# Altium PCB PCB1.PcbDoc (part 11 of 12)
Units mm, origin at the board's own origin, x right, y up, seen from the top; angles counter-clockwise.
Board outline 100 x 100 mm, 6 copper layers (Top Layer, Int1 (GND), Int2 (Sign), Int3 (Sign), Int4 (PWR), Bottom Layer), stack 1.538 mm thick; 614 components, 712 nets, 3014 pads, 1096 vias.
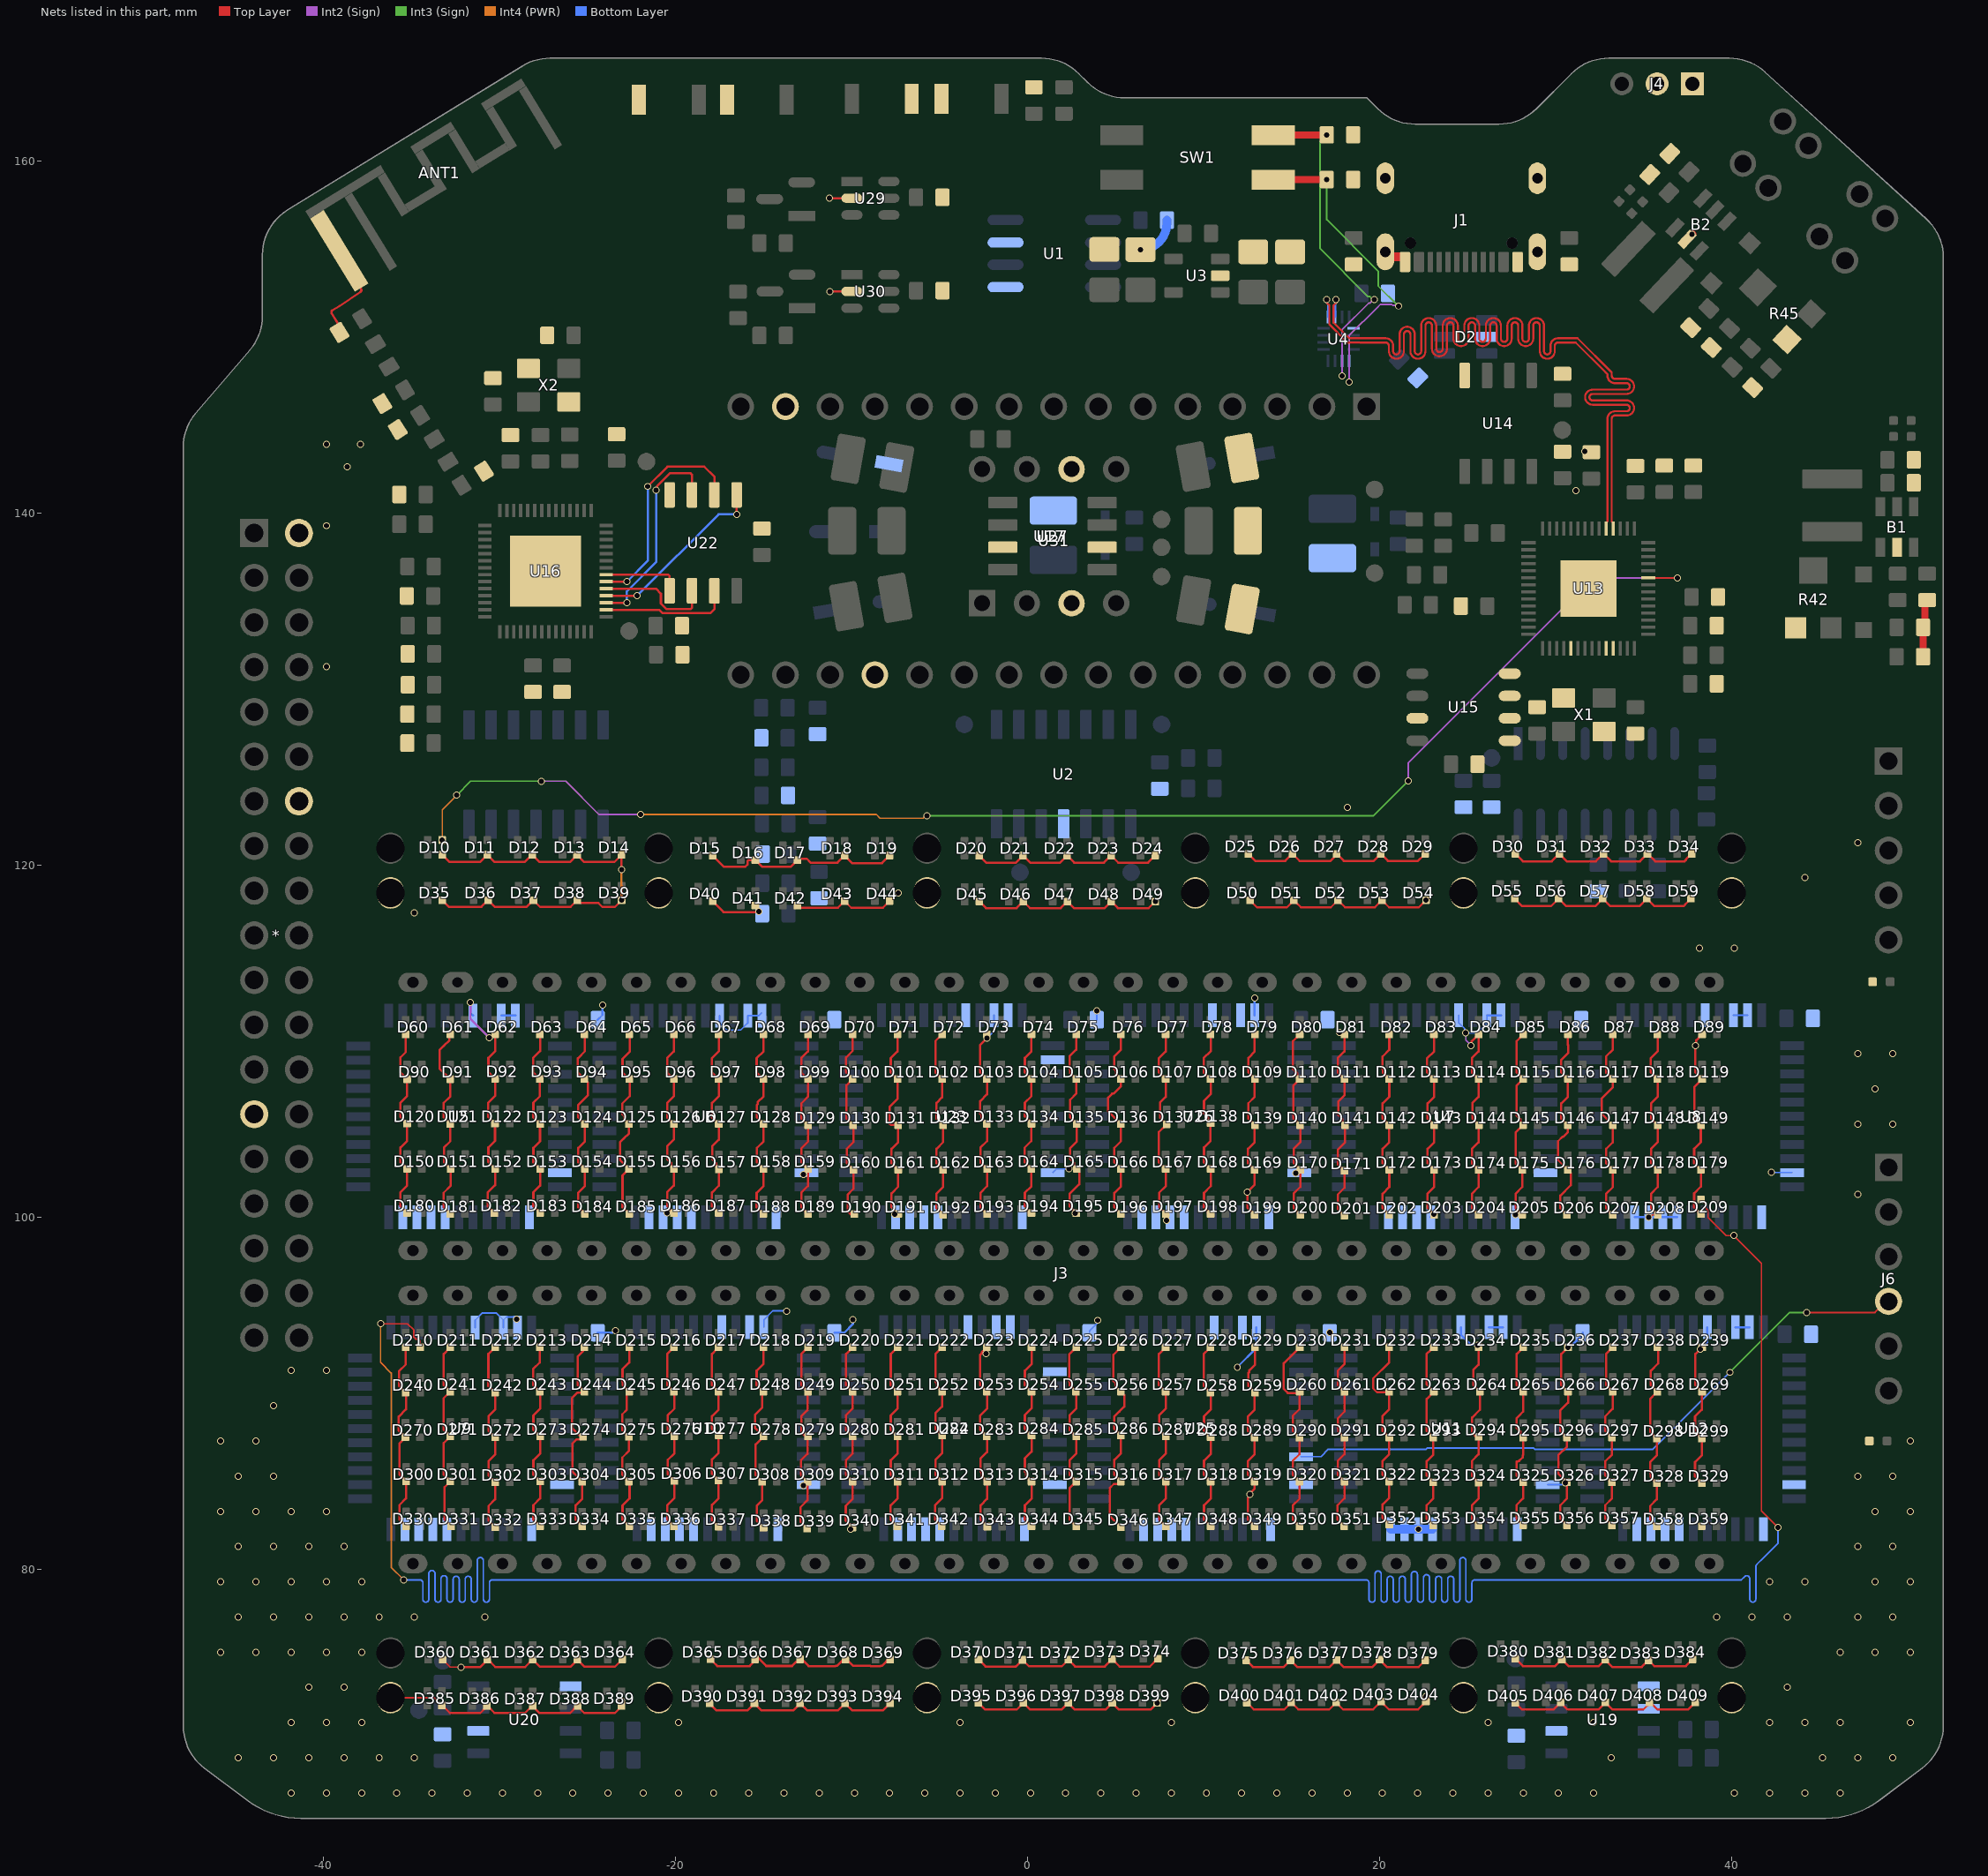
[diagram p14: the nets of this part, all layers, seen from the top]

## Via types
v1: diameter 0.4, hole 0.3, Top Layer to Bottom Layer, tented both sides, 1087 vias
v2: diameter 0.4, hole 0.3, Top Layer to Bottom Layer, 6 vias
v3: diameter 0.4, hole 0.3, Top Layer to Bottom Layer, tented top, 2 vias
v4: diameter 0.6, hole 0.5, Top Layer to Bottom Layer, 1 vias

## Nets (pads, with @x,y where several pads share a name; then routed paths per layer and width w, separated by ;. In a path a pad name is that pad's centre, name@x,y a point inside that pad or via, vN(x,y) a via of type N, cw(c..) or ccw(c..) an arc to the next point about the centre after c; other vN are vias at no path point) (continued)
REF: *.2 *.14 *.27 ANT1.2 B1.2 B2.2 C1.1 C2.1 C3.1 C4.1 C5.1 C6.1 C7.1 C8.1 C9.1 C10.1 C11.1 C12.1 C13.1 C14.1 C15.1 C16.1 C17.1 C18.1 C20.1 C21.1 C23.1 C25.1 C26.1 C27.1 C28.1 C29.1 C30.1 C31.1 C32.1 C33.1 C44.1 C45.1 C46.1 C47.1 C48.1 C49.1 C50.1 C51.1 C52.1 C53.1 C54.1 C55.1 C56.1 C57.1 C58.1 C59.1 C60.1 C61.1 C62.1 C63.1 C64.1 C65.1 C66.1 C67.1 C68.1 C69.1 C70.1 C71.1 C72.1 C73.1 C74.1 C75.1 C76.1 C77.1 C78.1 C79.1 C80.1 C81.1 C82.1 C83.1 C84.1 C85.1 C86.1 D1.K D2.2 D8.1 D10.3 D11.3 D12.3 D13.3 D14.3 D15.3 D16.3 D17.3 D18.3 D19.3 D20.3 D21.3 D22.3 D23.3 D24.3 D25.3 D26.3 D27.3 D28.3 D29.3 D30.3 D31.3 D32.3 D33.3 D34.3 D35.3 D36.3 D37.3 D38.3 D39.3 D40.3 D41.3 D42.3 D43.3 D44.3 D45.3 D46.3 D47.3 D48.3 D49.3 D50.3 D51.3 D52.3 D53.3 D54.3 D55.3 D56.3 D57.3 D58.3 D59.3 D60.3 D61.3 D62.3 D63.3 D64.3 D65.3 D66.3 D67.3 D68.3 D69.3 D70.3 D71.3 D72.3 D73.3 D74.3 D75.3 D76.3 D77.3 D78.3 D79.3 D80.3 D81.3 D82.3 D83.3 D84.3 D85.3 D86.3 D87.3 D88.3 D89.3 D90.3 D91.3 D92.3 D93.3 D94.3 D95.3 D96.3 D97.3 D98.3 D99.3 D100.3 D101.3 D102.3 D103.3 D104.3 D105.3 D106.3 D107.3 D108.3 D109.3 D110.3 D111.3 D112.3 D113.3 D114.3 D115.3 D116.3 D117.3 D118.3 D119.3 D120.3 D121.3 D122.3 D123.3 D124.3 D125.3 D126.3 D127.3 D128.3 D129.3 D130.3 D131.3 D132.3 D133.3 D134.3 D135.3 D136.3 D137.3 D138.3 D139.3 D140.3 D141.3 D142.3 D143.3 D144.3 D145.3 D146.3 D147.3 D148.3 D149.3 D150.3 D151.3 D152.3 D153.3 D154.3 D155.3 D156.3 D157.3 D158.3 D159.3 D160.3 D161.3 D162.3 D163.3 D164.3 D165.3 D166.3 D167.3 D168.3 D169.3 D170.3 D171.3 D172.3 D173.3 D174.3 D175.3 D176.3 D177.3 D178.3 D179.3 D180.3 D181.3 D182.3 D183.3 D184.3 D185.3 D186.3 D187.3 D188.3 D189.3 D190.3 D191.3 D192.3 D193.3 D194.3 D195.3 D196.3 D197.3 D198.3 D199.3 D200.3 D201.3 D202.3 D203.3 D204.3 D205.3 D206.3 D207.3 D208.3 D209.3 D210.3 D211.3 D212.3 D213.3 D214.3 D215.3 D216.3 D217.3 D218.3 D219.3 D220.3 D221.3 D222.3 D223.3 D224.3 D225.3 D226.3 D227.3 D228.3 D229.3 D230.3 D231.3 D232.3 D233.3 D234.3 D235.3 D236.3 D237.3 D238.3 D239.3 D240.3 D241.3 D242.3 D243.3 D244.3 D245.3 D246.3 D247.3 D248.3 D249.3 D250.3 D251.3 D252.3 D253.3 D254.3 D255.3 D256.3 D257.3 D258.3 D259.3 D260.3 D261.3 D262.3 D263.3 D264.3 D265.3 D266.3 D267.3 D268.3 D269.3 D270.3 D271.3 D272.3 D273.3 D274.3 D275.3 D276.3 D277.3 D278.3 D279.3 D280.3 D281.3 D282.3 D283.3 D284.3 D285.3 D286.3 D287.3 D288.3 D289.3 D290.3 D291.3 D292.3 D293.3 D294.3 D295.3 D296.3 D297.3 D298.3 D299.3 D300.3 D301.3 D302.3 D303.3 D304.3 D305.3 D306.3 D307.3 D308.3 D309.3 D310.3 D311.3 D312.3 D313.3 D314.3 D315.3 D316.3 D317.3 D318.3 D319.3 D320.3 D321.3 D322.3 D323.3 D324.3 D325.3 D326.3 D327.3 D328.3 D329.3 D330.3 D331.3 D332.3 D333.3 D334.3 D335.3 D336.3 D337.3 D338.3 D339.3 D340.3 D341.3 D342.3 D343.3 D344.3 D345.3 D346.3 D347.3 D348.3 D349.3 D350.3 D351.3 D352.3 D353.3 D354.3 D355.3 D356.3 D357.3 D358.3 D359.3 D360.3 D361.3 D362.3 D363.3 D364.3 D365.3 D366.3 D367.3 D368.3 D369.3 D370.3 D371.3 D372.3 D373.3 D374.3 D375.3 D376.3 D377.3 D378.3 D379.3 D380.3 D381.3 D382.3 D383.3 D384.3 D385.3 D386.3 D387.3 D388.3 D389.3 D390.3 D391.3 D392.3 D393.3 D394.3 D395.3 D396.3 D397.3 D398.3 D399.3 D400.3 D401.3 D402.3 D403.3 D404.3 D405.3 D406.3 D407.3 D408.3 D409.3 J1.A1B12 J1.B1A12 J1.SH J3.62 J3.64 J4.1 J4.2 JP6.2 JP7.2 R2.2 R3.2 R5.1 R6.1 R7.1 R15.1 R23.1 R25.1 R28.1 R34.1 R42.1 R43.1 R45.1 R46.1 SW2.1 SW3.2 SW4.1 SW5.1 U1.5 U1.7 U2.11 U3.2 U4.1 U5.10 U5.12 U5.18 U5.19 U5.20 U5.21 U5.40 U5.42 U5.43 U6.10 U6.12 U6.18 U6.19 U6.20 U6.21 U6.40 U6.42 U6.43 U7.10 U7.12 U7.18 U7.19 U7.20 U7.21 U7.40 U7.42 U7.43 U8.10 U8.12 U8.18 U8.19 U8.20 U8.21 U8.40 U8.42 U8.43 U9.10 U9.12 U9.18 U9.19 U9.20 U9.21 U9.40 U9.42 U9.43 U10.10 U10.12 U10.18 U10.19 U10.20 U10.21 U10.40 U10.42 U10.43 U11.10 U11.12 U11.18 U11.19 U11.20 U11.21 U11.40 U11.42 U11.43 U12.10 U12.12 U12.18 U12.19 U12.20 U12.21 U12.40 U12.42 U12.43 U13.19 U13.57 U14.4 U15.1 U15.2 U15.3 U15.4 U15.7 U16.57 U17.3 U17.6 U19.1 U19.2 U19.6 U20.1 U20.6 U22.4 U23.2 U23.10 U23.12 U23.18 U23.19 U23.20 U23.21 U23.40 U23.42 U23.43 U24.2 U24.10 U24.12 U24.18 U24.19 U24.20 U24.21 U24.40 U24.42 U24.43 U25.10 U25.12 U25.18 U25.19 U25.20 U25.21 U25.40 U25.42 U25.43 U26.10 U26.12 U26.18 U26.19 U26.20 U26.21 U26.40 U26.42 U26.43 U27.3 U27.6 U29.2 U30.2 U31.14 U31.19 X1.2 X1.4 X2.2 X2.4 | length 978.4
  Top Layer w0.09: ANT1.2@-40.273,156.663 -39.12,155.51 ANT1.2@-39.12,154.905 ; J3.64@-36.202,72.716 -36.2,72.713 -33.733,72.713 D385.3@-33.281,72.262 ; D360.3@-33.24,74.882 -32.81,74.452 v1(-32.21,74.452) ; D389.3@-23.08,72.251 v1(-23.08,72.539) ; v1(-20.489,100.253) -20.259,100.253 D186.3@-20.107,100.253 ; D41.3@-15.479,117.719 -15.316,117.556 -15.316,117.416 -15.324,117.408 v1@-15.357,117.375 ; D44.3@-7.857,117.971 -7.392,118.436 v1(-7.356,118.436) ; D394.3@-7.83,72.393 v1(-7.83,72.681) ; v1(-7.569,100.193) -7.512,100.193 D191.3@-7.36,100.193 ; v1(-2.365,92.25) -2.365,92.583 D223.3@-2.327,92.621 ; v1(-2.327,110.182) D73.3@-2.327,110.401 ; v1@3.928,111.735 v1(3.929,111.733) ; C1.1@14.891,154.683 14.891,154.844 C1.1@14.905,154.858 C1.1@15.106,155.059 ; v1(17.7,110.522) 17.872,110.522 D81.3@17.993,110.401 ; v1(22.618,72.781) 22.62,72.779 D404.3@22.62,72.493 ; D54.3@22.623,118.021 v1(22.63,118.028) ; v1(27.699,100.153) D205.3@28.09,100.153 ; v1(35.287,100.013) 35.353,100.013 35.483,100.143 D208.3@35.79,100.143
  Top Layer w0.127: ANT1.2@-39.12,154.905 -37.934,152.833 -37.884,152.75 cw(c-37.992,152.684) -37.92,152.579 -39.1,151.777 cw(c-39.171,151.882) -39.107,151.772 -39.504,151.541 ccw(c-39.44,151.431) -39.549,151.365 -39.156,150.716 C54.1@-39.104,150.281 ; D270.3@-35.468,87.565 -35.468,87.61 -35.739,87.881 -35.739,88.684 -35.324,89.099 -35.324,90.058 -35.352,90.058 -35.726,90.431 -35.726,91.261 -35.347,91.64 -35.347,92.542 D210.3@-35.411,92.606 ; D300.3@-35.449,85.021 -35.465,85.037 -35.465,85.148 -35.692,85.375 -35.692,87.171 -35.33,87.533 D270.3@-35.324,87.533 ; D120.3@-35.404,105.36 -35.412,105.368 -35.412,105.479 -35.639,105.706 -35.639,106.515 -35.26,106.893 D90.3@-35.26,107.853 -35.639,108.231 -35.639,109.095 -35.347,109.386 D60.3@-35.347,110.401 ; D150.3@-35.385,102.816 -35.412,102.843 -35.412,102.914 -35.639,103.141 -35.639,103.97 -35.26,104.348 D120.3@-35.26,105.328 ; D330.3@-35.324,82.458 -35.703,82.836 -35.703,83.652 -35.324,84.03 D300.3@-35.324,84.968 ; D180.3@-35.26,100.253 -35.639,100.631 -35.639,101.432 -35.26,101.811 D150.3@-35.26,102.763 ; D35.3@-33.27,118.021 -32.895,117.645 -31.045,117.645 D36.3@-30.665,118.025 -30.285,117.645 -28.469,117.645 D37.3@-28.089,118.025 -27.707,117.642 -26.014,117.642 -26.011,117.645 -25.972,117.645 D38.3@-25.596,118.021 -25.445,117.869 -24.397,117.869 -24.17,117.642 -23.455,117.642 v1(-23.076,118.021) ; D10.3@-33.27,120.611 -32.848,120.188 -31.13,120.188 D11.3@-30.707,120.611 -30.285,120.188 -28.58,120.188 D12.3@-28.157,120.611 -27.742,120.196 -26.011,120.196 D13.3@-25.607,120.6 -25.202,120.196 -23.491,120.196 D14.3@-23.087,120.6 -23.088,120.449 v1(-23.088,119.771) ; D360.3@-33.243,74.886 D360.3@-33.24,74.882 ; D385.3@-33.241,72.249 -32.837,71.845 -31.106,71.845 -30.85,72.1 D386.3@-30.814,72.1 ; D271.3@-32.904,87.56 -32.904,87.646 -33.189,87.931 -33.189,89.721 -32.857,90.053 -32.76,90.053 -32.76,90.056 -33.186,90.481 -33.186,92.242 -32.847,92.581 D211.3@-32.847,92.601 ; D301.3@-32.885,85.016 -32.885,85.077 -33.189,85.381 -33.189,87.174 -32.835,87.528 D271.3@-32.76,87.528 ; D181.3@-32.842,100.225 -32.842,100.235 -33.189,100.581 -33.189,101.398 -32.793,101.794 D151.3@-32.793,102.763 -33.171,103.141 -33.171,103.971 -32.81,104.332 D121.3@-32.81,105.313 -33.189,105.691 -33.189,106.507 -32.81,106.886 D91.3@-32.81,107.853 -33.421,108.463 -33.421,109.51 -33.178,109.753 -33.175,109.753 -32.858,110.07 -32.858,110.35 D61.3@-32.807,110.401 ; D331.3@-32.76,82.453 -33.139,82.831 -33.139,84.674 -32.85,84.963 D301.3@-32.76,84.963 ; v1@-32.21,74.463 -31.103,74.463 -30.68,74.886 -30.258,74.463 -28.553,74.463 D362.3@-28.13,74.886 -27.715,74.471 -25.984,74.471 -25.58,74.876 -25.175,74.471 -23.464,74.471 D364.3@-23.06,74.876 ; D386.3@-30.701,72.249 -30.297,71.845 -28.556,71.845 -28.151,72.249 -27.738,71.836 -26.014,71.836 -25.601,72.249 -25.197,71.845 -23.456,71.845 D389.3@-23.065,72.235 ; v1(-30.596,110.218) -30.543,110.271 -30.397,110.271 D62.3@-30.267,110.401 -30.267,109.44 -30.646,109.061 -30.646,108.252 D92.3@-30.267,107.874 -30.267,106.905 -30.649,106.523 -30.649,105.706 D122.3@-30.271,105.328 -30.271,104.346 -30.646,103.971 -30.646,103.141 D152.3@-30.307,102.803 ; D272.3@-30.404,87.51 -30.412,87.518 -30.412,87.654 -30.639,87.881 -30.639,88.702 -30.26,89.081 -30.26,90.046 -30.646,90.431 -30.646,92.242 -30.347,92.541 D212.3@-30.347,92.551 ; D182.3@-30.394,100.227 -30.394,100.334 -30.688,100.629 -30.688,101.409 -30.267,101.83 D152.3@-30.267,102.763 ; D302.3@-30.385,84.966 -30.412,84.993 -30.412,85.104 -30.639,85.331 -30.639,86.152 -30.26,86.531 D272.3@-30.26,87.478 ; D332.3@-30.26,82.403 -30.639,82.781 -30.639,83.602 -30.26,83.981 D302.3@-30.26,84.913 ; D273.3@-27.854,87.56 -27.862,87.568 -27.862,87.704 -28.089,87.931 -28.089,88.752 -27.71,89.131 -27.71,90.086 -28.09,90.466 -28.09,90.653 -28.106,90.669 -28.106,91.38 -27.727,91.758 -27.727,92.531 D213.3@-27.797,92.601 ; D183.3@-27.837,100.217 -27.862,100.242 -27.862,100.404 -28.089,100.631 -28.089,101.427 -27.71,101.806 D153.3@-27.71,102.753 ; D303.3@-27.835,85.016 -27.862,85.043 -27.862,85.154 -28.089,85.381 -28.089,86.202 -27.71,86.581 D273.3@-27.71,87.528 ; D153.3@-27.75,102.793 -28.089,103.131 -28.089,103.954 -27.714,104.329 -27.714,105.318 -27.725,105.318 -28.089,105.681 -28.089,106.521 -27.727,106.882 -27.727,107.847 D93.3@-27.714,107.86 ; D93.3@-27.727,107.874 -28.106,108.252 -28.106,109.053 -27.71,109.448 D63.3@-27.71,110.391 ; D333.3@-27.71,82.453 -28.089,82.831 -28.089,83.652 -27.71,84.031 D303.3@-27.71,84.963 ; D274.3@-25.454,87.59 -25.893,88.03 -25.893,89.748 -25.593,90.048 -25.189,90.048 -25.161,90.077 -25.567,90.482 -25.567,92.105 D214.3@-25.26,92.411 ; D304.3@-25.435,85.046 -25.462,85.073 -25.462,85.144 -25.869,85.552 -25.869,87.164 -25.64,87.393 -25.412,87.393 -25.31,87.495 D274.3@-25.31,87.558 ; D334.3@-25.31,82.483 -25.34,82.483 -25.689,82.831 -25.689,83.647 -25.31,84.026 D304.3@-25.31,84.993 ; D184.3@-25.287,100.217 -25.312,100.243 -25.312,100.354 -25.539,100.581 -25.539,101.402 -25.16,101.781 D154.3@-25.16,102.753 ; D154.3@-25.2,102.793 -25.539,103.131 -25.539,103.954 -25.164,104.329 -25.164,105.318 -25.175,105.318 -25.539,105.681 -25.539,106.397 -24.987,106.948 -24.987,107.661 D94.3@-25.16,107.834 ; D94.3@-25.187,107.861 -25.566,108.239 -25.566,109.042 -25.16,109.447 D64.3@-25.16,110.391 ; D275.3@-22.804,87.59 -22.812,87.598 -22.812,87.694 -23.039,87.921 -23.039,88.816 -22.791,89.064 -22.791,89.952 -22.66,90.083 -22.66,90.116 -23.008,90.463 -23.008,90.651 -23.026,90.669 -23.026,91.38 -22.647,91.758 -22.647,92.531 D215.3@-22.747,92.631 ; D305.3@-22.785,85.046 -22.812,85.073 -22.812,85.144 -23.039,85.371 -23.039,86.36 -22.66,86.739 D275.3@-22.66,87.558 ; D185.3@-22.747,100.178 -22.747,100.302 -23.026,100.581 -23.026,102.387 D155.3@-22.7,102.713 ; D335.3@-22.66,82.483 -22.677,82.483 -23.026,82.831 -23.026,83.636 -22.625,84.037 -22.625,84.957 D305.3@-22.66,84.993 ; D155.3@-22.66,102.753 -23.154,103.246 -23.154,104.287 -22.946,104.495 -22.66,104.78 -22.66,105.253 -22.636,105.278 -22.946,105.588 -22.946,105.776 -23.039,105.869 -23.039,106.468 -22.612,106.895 -22.612,107.495 -22.621,107.503 -22.621,107.834 -23.026,108.239 -23.026,109.004 -22.621,109.409 D65.3@-22.621,110.351 ; D186.3@-20.259,100.253 -20.259,100.404 -20.486,100.631 -20.486,101.427 -20.107,101.806 D156.3@-20.107,102.738 ; D276.3@-20.222,87.627 -20.24,87.645 -20.24,87.716 -20.467,87.943 -20.467,88.753 -20.078,89.142 -20.078,90.12 -20.124,90.12 -20.486,90.481 -20.486,92.242 -20.165,92.563 D216.3@-20.165,92.668 ; D306.3@-20.203,85.083 -20.23,85.11 -20.23,85.181 -20.457,85.408 -20.457,86.222 -20.078,86.6 D276.3@-20.078,87.595 ; D156.3@-20.147,102.778 -20.262,102.893 -20.262,103.092 -20.489,103.319 -20.489,104.046 -20.11,104.424 D126.3@-20.11,105.303 -20.489,105.681 -20.489,106.504 -20.107,106.886 D96.3@-20.107,107.861 -20.486,108.239 -20.486,109.055 -20.107,109.434 D66.3@-20.107,110.376 ; D336.3@-20.078,82.52 -20.177,82.52 -20.489,82.831 -20.489,83.65 -20.078,84.06 D306.3@-20.078,85.03 ; D390.3@-18.08,72.393 -17.676,71.988 -15.935,71.988 D391.3@-15.53,72.393 -15.126,71.988 -13.335,71.988 D392.3@-12.93,72.393 -12.526,71.988 -10.785,71.988 D393.3@-10.38,72.393 -9.976,71.988 -8.235,71.988 D394.3@-7.83,72.393 ; D40.3@-17.907,117.971 -17.287,117.35 -16.582,117.35 -16.573,117.341 -15.391,117.341 v1@-15.357,117.375 ; D15.3@-17.907,120.561 -17.277,119.931 -16.045,119.931 -15.931,120.045 -15.931,120.235 -15.856,120.309 D16.3@-15.479,120.309 -15.101,119.931 -13.458,119.931 -13.014,120.375 -12.555,120.375 -12.337,120.156 -10.812,120.156 D18.3@-10.407,120.561 -9.982,120.135 -8.283,120.135 D19.3@-7.857,120.561 ; D365.3@-17.88,74.983 -17.875,74.977 -17.875,74.744 -17.637,74.506 -15.807,74.506 -15.33,74.983 -14.862,74.514 -13.399,74.514 -13.172,74.741 -13.092,74.741 -12.93,74.903 -12.93,74.983 -12.454,74.506 -10.921,74.506 -10.904,74.524 -10.839,74.524 -10.38,74.983 -9.921,74.524 -8.946,74.524 -8.914,74.492 -8.386,74.492 -8.354,74.524 -8.289,74.524 D369.3@-7.83,74.983 ; D277.3@-17.708,87.651 -17.712,87.655 -17.712,87.754 -17.939,87.981 -17.939,88.711 -17.564,89.086 -17.564,90.144 -17.609,90.144 -17.946,90.481 -17.946,92.242 -17.651,92.537 D217.3@-17.651,92.692 ; D307.3@-17.689,85.107 -17.716,85.134 -17.716,85.205 -17.943,85.432 -17.943,86.253 -17.564,86.631 D277.3@-17.564,87.619 ; D187.3@-17.684,100.202 -17.714,100.233 -17.714,100.403 -17.941,100.63 -17.941,101.417 -17.557,101.801 D157.3@-17.557,102.738 ; D157.3@-17.597,102.778 -17.707,102.888 -17.707,103.079 -17.934,103.306 -17.934,104.042 -17.56,104.415 D127.3@-17.56,105.303 -17.939,105.681 -17.939,106.504 -17.557,106.886 -17.557,107.851 -17.946,108.239 -17.946,109.05 -17.557,109.439 D67.3@-17.557,110.376 ; D337.3@-17.564,82.544 -17.682,82.544 -17.946,82.808 -17.946,83.665 -17.564,84.046 D307.3@-17.564,85.054 ; v1@-15.324,117.408 v1(-15.291,117.375) ; D308.3@-15.209,85.033 -15.237,85.06 -15.237,85.131 -15.464,85.358 -15.464,87.1 -15.16,87.403 D278.3@-15.16,87.509 ; D218.3@-15.172,92.618 -15.172,92.614 -15.027,92.469 -15.027,91.665 -15.406,91.286 -15.406,90.481 -15.085,90.16 -15.085,89.204 -15.504,88.785 -15.504,88.046 D278.3@-15.01,87.553 ; D188.3@-15.138,100.216 -15.138,100.314 -15.406,100.581 -15.406,101.394 -15.012,101.788 D158.3@-15.012,102.751 ; D338.3@-15.085,82.47 -15.112,82.47 -15.384,82.742 -15.384,83.636 -15.085,83.935 D308.3@-15.085,84.98 ; D158.3@-15.052,102.791 -15.052,102.794 -15.389,103.131 -15.389,103.954 -15.015,104.328 -15.015,105.308 -15.389,105.681 -15.389,106.397 -15.345,106.44 -15.345,106.551 -15.012,106.884 -15.012,107.845 -15.406,108.239 -15.406,109.047 -15.012,109.441 D68.3@-15.012,110.389 ; D42.3@-13.079,117.719 -12.952,117.592 -10.786,117.592 D43.3@-10.407,117.971 -10.029,117.592 -8.236,117.592 D44.3@-7.857,117.971 ; v1(-12.741,84.757) D309.3@-12.513,84.985 ; v1(-12.737,102.448) -12.737,102.504 D159.3@-12.526,102.716 ; D279.3@-12.656,87.582 -12.866,87.792 -12.866,88.695 -12.513,89.048 -12.513,90.128 -12.866,90.481 -12.866,92.242 -12.6,92.508 D219.3@-12.6,92.623 ; D309.3@-12.637,85.038 -12.665,85.065 -12.665,85.137 -12.891,85.364 -12.891,86.193 -12.513,86.572 D279.3@-12.513,87.55 ; D189.3@-12.614,100.219 -12.639,100.244 -12.639,100.353 -12.866,100.58 -12.866,101.402 -12.487,101.781 D159.3@-12.487,102.754 ; D159.3@-12.527,102.794 -12.866,103.133 -12.866,103.925 -12.491,104.3 -12.491,105.251 -12.862,105.622 -12.862,106.478 -12.487,106.853 D99.3@-12.487,107.861 -12.866,108.239 -12.866,109.055 -12.487,109.434 D69.3@-12.487,110.392 ; D339.3@-12.513,82.475 -12.516,82.478 -12.685,82.478 -12.912,82.705 -12.912,83.531 -12.513,83.931 -12.513,84.757 ; v1(-11.273,157.908) U29.2@-9.996,157.908 ; v1(-11.25,152.608) U30.2@-9.995,152.608 ; D280.3@-10.104,87.59 -10.112,87.598 -10.112,87.704 -10.339,87.931 -10.339,88.752 -9.96,89.131 -9.96,90.116 -10.326,90.481 -10.326,92.242 -10.047,92.521 D220.3@-10.047,92.631 ; D310.3@-10.085,85.046 -10.112,85.073 -10.112,85.144 -10.339,85.371 -10.339,86.197 -9.96,86.576 D280.3@-9.96,87.558 ; v1(-10.077,82.274) D340.3@-9.964,82.387 ; D340.3@-10.06,82.483 -10.342,82.765 -10.342,83.612 -9.96,83.994 D310.3@-9.96,84.993 ; D190.3@-10.037,100.167 -10.239,100.369 -10.239,101.296 -9.91,101.625 D160.3@-9.91,102.703 ; D160.3@-9.95,102.743 -10.289,103.081 -10.289,103.899 -9.914,104.274 -9.914,105.268 -9.948,105.268 -10.303,105.622 -10.303,107.505 -9.984,107.824 -9.91,107.824 -10.099,108.012 -10.293,108.229 cw(c-10.199,108.314) -10.326,108.314 -10.326,109.092 -9.947,109.471 -9.947,110.304 D70.3@-9.91,110.341 ; D281.3@-7.551,87.59 -7.559,87.598 -7.559,87.704 -7.786,87.931 -7.786,88.752 -7.407,89.131 D251.3@-7.407,90.103 -7.786,90.481 -7.786,92.242 -7.494,92.534 D221.3@-7.494,92.631 ; D311.3@-7.532,85.046 -7.559,85.073 -7.559,85.144 -7.786,85.371 -7.786,86.197 -7.407,86.576 D281.3@-7.407,87.558 ; D191.3@-7.512,100.193 D191.3@-7.487,100.167 ; D191.3@-7.512,100.344 -7.739,100.571 -7.739,101.372 -7.36,101.751 D161.3@-7.36,102.703 ; D341.3@-7.407,82.483 -7.45,82.483 -7.789,82.821 -7.789,83.641 -7.407,84.022 D311.3@-7.407,84.993 ; D161.3@-7.4,102.743 -7.739,103.081 -7.739,103.899 -7.364,104.274 -7.364,105.228 -7.384,105.248 -7.77,105.248 -7.845,105.322 -7.845,106.297 -7.407,106.734 -7.407,107.767 -7.36,107.814 -7.786,108.239 -7.786,109.055 -7.407,109.434 -7.407,110.249 -7.36,110.296 D71.3@-7.36,110.341 ; D282.3@-5.011,87.59 -5.019,87.598 -5.019,87.754 -5.244,87.979 -5.244,88.173 -5.246,88.175 -5.246,88.874 -4.867,89.252 D252.3@-4.867,90.103 -5.162,90.397 -5.162,90.585 -5.246,90.669 -5.246,92.242 -4.954,92.534 D222.3@-4.954,92.631 ; D312.3@-4.992,85.046 -5.019,85.073 -5.019,85.144 -5.246,85.371 -5.246,86.222 -4.867,86.601 D282.3@-4.867,87.558 ; D192.3@-4.937,100.167 -4.962,100.192 -4.962,100.304 -5.189,100.531 -5.189,101.352 -4.81,101.731 D162.3@-4.81,102.703 ; D342.3@-4.867,82.483 -4.92,82.483 -5.274,82.836 -5.274,83.636 -4.867,84.042 D312.3@-4.867,84.993 ; D162.3@-4.85,102.743 -5.189,103.081 -5.189,103.899 -4.814,104.274 -4.814,105.268 -4.829,105.268 -5.184,105.622 -5.184,106.508 -4.867,106.824 D102.3@-4.867,107.861 -5.246,108.239 -5.246,110.022 -4.927,110.341 D72.3@-4.81,110.341 ; D395.3@-2.8,72.416 -2.422,72.037 -0.629,72.037 D396.3@-0.25,72.416 0.128,72.037 1.921,72.037 D397.3@2.3,72.416 2.678,72.037 4.421,72.037 D398.3@4.8,72.416 5.178,72.037 6.971,72.037 v1(7.35,72.416) ; D370.3@-2.799,74.887 -2.4,74.489 -0.676,74.489 ; D20.3@-2.767,120.561 -2.363,120.156 -0.672,120.156 D21.3@-0.267,120.561 0.137,120.156 1.831,120.156 D22.3@2.236,120.561 2.64,120.156 4.328,120.156 D23.3@4.733,120.561 5.137,120.156 6.828,120.156 D24.3@7.233,120.561 ; D45.3@-2.754,117.949 -2.376,117.57 -0.633,117.57 D46.3@-0.254,117.949 0.124,117.57 1.867,117.57 D47.3@2.246,117.949 2.624,117.57 4.367,117.57 D48.3@4.746,117.949 5.124,117.57 6.867,117.57 v1(7.246,117.949) ; D283.3@-2.454,87.59 -2.479,87.615 -2.479,87.704 -2.706,87.931 -2.706,88.744 -2.31,89.139 -2.31,90.086 -2.702,90.477 -2.702,90.665 -2.706,90.669 -2.706,92.189 -2.611,92.283 -2.611,92.337 -2.397,92.551 D223.3@-2.397,92.621 ; D193.3@-2.437,100.207 -2.462,100.232 -2.462,100.354 -2.689,100.581 -2.689,101.397 -2.31,101.776 D163.3@-2.31,102.743 ; D313.3@-2.435,85.046 -2.462,85.073 -2.462,85.144 -2.607,85.29 -2.607,85.477 -2.689,85.559 -2.689,86.291 -2.31,86.669 D283.3@-2.31,87.558 ; D163.3@-2.35,102.783 -2.689,103.121 -2.689,103.958 -2.314,104.333 -2.314,105.307 -2.627,105.621 -2.627,105.808 -2.706,105.887 -2.706,106.6 -2.31,106.996 -2.31,107.844 -2.706,108.239 -2.706,109.803 v1(-2.327,110.182) ; D343.3@-2.31,82.483 -2.34,82.483 -2.674,82.816 -2.674,83.647 -2.31,84.011 D313.3@-2.31,84.993 ; -0.675,74.49 -0.675,74.494 D371.3@-0.302,74.868 0.074,74.492 1.926,74.492 D372.3@2.305,74.87 2.686,74.489 4.374,74.489 D373.3@4.794,74.909 5.213,74.489 6.943,74.489 D374.3@7.389,74.936 ; D284.3@0.069,87.59 0.061,87.598 0.061,87.754 -0.166,87.981 -0.166,88.777 0.213,89.156 D254.3@0.213,90.103 -0.166,90.481 -0.166,91.286 0.213,91.665 D224.3@0.213,92.544 ; D194.3@0.074,100.225 0.061,100.238 0.061,100.394 -0.166,100.621 -0.166,101.407 0.2,101.773 D164.3@0.2,102.76 ; D314.3@0.088,85.046 0.061,85.073 0.061,85.144 -0.093,85.298 -0.093,85.486 -0.166,85.559 -0.166,86.316 0.213,86.694 D284.3@0.213,87.558 ; D164.3@0.161,102.8 -0.178,103.139 -0.178,103.966 0.197,104.342 0.197,105.336 0.061,105.472 0.061,105.513 -0.166,105.74 -0.166,106.521 0.2,106.887 0.2,107.873 -0.166,108.239 -0.166,109.061 0.2,109.427 D74.3@0.2,110.398 ; D344.3@0.213,82.483 0.183,82.483 -0.166,82.831 -0.166,83.647 0.213,84.026 D314.3@0.213,84.993 ; D225.3@2.595,92.462 2.361,92.229 2.361,90.669 2.392,90.638 2.392,90.45 2.753,90.09 2.753,89.131 2.374,88.752 2.374,87.931 2.601,87.704 2.601,87.598 D285.3@2.609,87.59 ; D225.3@2.595,92.463 2.666,92.534 D225.3@2.666,92.631 ; D315.3@2.628,85.046 2.601,85.073 2.601,85.144 2.374,85.371 2.374,86.197 2.753,86.576 D285.3@2.753,87.558 ; D195.3@2.663,100.332 2.374,100.621 2.374,101.337 2.925,101.888 2.925,102.617 D165.3@2.79,102.753 ; v1(2.689,100.243) D195.3@2.753,100.243 ; D165.3@2.75,102.793 2.638,102.904 2.638,103.092 2.411,103.319 2.411,103.941 2.786,104.316 2.786,105.318 2.775,105.318 2.411,105.681 2.411,106.688 2.753,107.03 D105.3@2.753,107.861 2.401,108.213 2.401,108.4 2.374,108.427 2.374,109.149 2.753,109.527 2.753,110.354 D75.3@2.79,110.391 ; D345.3@2.753,82.483 2.723,82.483 2.374,82.831 2.374,84.614 D315.3@2.753,84.993 ; D196.3@5.163,100.207 5.141,100.229 5.141,100.344 4.914,100.571 4.914,101.394 5.29,101.769 D166.3@5.29,102.743 ; D316.3@5.168,85.046 5.141,85.073 5.141,85.144 4.914,85.371 4.914,86.222 5.293,86.601 D286.3@5.293,87.558 ; D226.3@5.206,92.631 5.206,92.534 4.872,92.2 4.872,90.708 4.976,90.604 4.976,90.417 5.476,89.916 5.476,89.25 5.199,88.974 5.191,88.974 4.914,88.697 4.914,87.981 D286.3@5.293,87.603 ; D166.3@5.25,102.783 4.911,103.121 4.911,103.949 5.286,104.324 5.286,105.308 5.285,105.308 4.564,106.029 4.564,106.802 4.792,107.031 4.866,107.031 5.29,107.455 5.29,107.864 5,108.154 5,108.342 4.914,108.427 4.914,109.15 5.29,109.526 D76.3@5.29,110.381 ; D346.3@5.293,82.483 5.213,82.483 4.65,83.045 4.65,84.619 4.887,84.856 5.156,84.856 D316.3@5.293,84.993 ; D287.3@7.696,87.59 7.688,87.598 7.688,87.704 7.461,87.931 7.461,88.752 7.84,89.131 7.84,90.096 7.454,90.481 7.454,92.242 7.753,92.541 D227.3@7.753,92.631 ; D197.3@7.706,100.207 7.688,100.225 7.688,100.354 7.461,100.581 7.461,101.401 7.833,101.772 D167.3@7.833,102.743 ; D317.3@7.715,85.046 7.688,85.073 7.688,85.144 7.461,85.371 7.461,86.197 7.84,86.576 D287.3@7.84,87.558 ; D167.3@7.793,102.783 7.454,103.121 7.454,104.857 7.829,105.233 7.829,105.353 7.511,105.671 7.511,106.53 7.833,106.851 D107.3@7.833,107.861 7.454,108.239 7.454,109.055 7.833,109.434 D77.3@7.833,110.381 ; D347.3@7.84,82.483 7.81,82.483 7.461,82.831 7.461,83.647 7.84,84.026 D317.3@7.84,84.993 ; D197.3@7.84,100.203 7.855,100.187 7.855,99.858 v1(7.871,99.843) ; D288.3@10.246,87.59 10.238,87.598 10.238,87.654 10.011,87.881 10.011,88.702 10.39,89.081 10.39,90.083 10.343,90.083 9.994,90.431 9.994,92.242 10.303,92.551 D228.3@10.303,92.631 ; D198.3@10.263,100.207 10.238,100.232 10.238,100.354 10.011,100.581 10.011,101.397 10.39,101.776 D168.3@10.39,102.743 ; D318.3@10.265,85.046 10.238,85.073 10.238,85.144 10.011,85.371 10.011,86.172 10.39,86.551 D288.3@10.39,87.558 ; D168.3@10.35,102.783 10.011,103.121 10.011,103.974 10.386,104.349 10.386,105.356 10.238,105.504 10.238,105.692 10.011,105.919 10.011,106.625 10.39,107.003 10.39,107.844 9.994,108.239 9.994,109.047 10.39,109.442 D78.3@10.39,110.381 ; D348.3@10.39,82.483 10.36,82.483 10.011,82.831 10.011,83.647 10.39,84.026 D318.3@10.39,84.993 ; D375.3@12.406,74.841 12.787,74.46 14.546,74.46 D376.3@14.927,74.841 15.307,74.46 17.15,74.46 D377.3@17.545,74.855 17.94,74.46 19.58,74.46 D378.3@19.99,74.87 20.4,74.46 22.206,74.46 D379.3@22.587,74.841 ; D400.3@12.443,72.436 12.834,72.045 14.572,72.045 D401.3@14.97,72.443 15.367,72.045 17.122,72.045 D402.3@17.52,72.443 17.917,72.045 19.622,72.045 D403.3@20.07,72.493 20.517,72.045 22.172,72.045 D404.3@22.62,72.493 ; v1(12.476,101.441) 12.476,101.387 12.511,101.352 12.476,101.317 12.476,100.567 12.738,100.304 12.738,100.193 D199.3@12.763,100.167 ; D25.3@12.523,120.661 12.924,120.26 13.927,120.26 13.931,120.256 14.631,120.256 D26.3@15.035,120.661 15.44,120.256 17.202,120.256 D27.3@17.428,120.482 ; v1@12.538,101.379 12.538,101.503 12.89,101.854 D169.3@12.89,102.703 ; D50.3@12.543,117.936 12.708,117.936 13.027,117.616 14.718,117.616 D51.3@15.123,118.021 ; v1(12.625,84.265) v1@12.738,84.265 ; D289.3@12.746,87.59 12.738,87.598 12.738,87.644 12.511,87.871 12.511,88.697 12.89,89.076 12.89,90.083 12.883,90.083 12.534,90.431 12.534,91.163 12.585,91.215 12.585,91.312 12.913,91.64 12.913,92.469 12.803,92.579 D229.3@12.803,92.631 ; D319.3@12.765,85.046 12.738,85.073 12.738,85.144 12.511,85.371 12.511,86.167 12.89,86.546 D289.3@12.89,87.558 ; D169.3@12.85,102.743 12.511,103.081 12.511,103.899 12.886,104.274 12.886,105.268 12.532,105.622 12.532,106.487 12.89,106.844 12.89,107.884 12.534,108.239 12.534,109.067 12.89,109.422 D79.3@12.89,110.341 ; D349.3@12.89,82.483 12.86,82.483 12.511,82.831 12.511,84.077 12.699,84.265 v1@12.738,84.265 ; D319.3@12.89,84.993 12.873,84.977 12.873,84.569 12.686,84.382 12.686,84.317 v1@12.738,84.265 ; v1(15.23,102.513) 15.3,102.513 D170.3@15.49,102.703 15.49,101.731 15.111,101.352 15.111,100.531 15.338,100.304 15.338,100.193 D200.3@15.363,100.167 ; D51.3@15.232,117.908 15.236,117.908 15.527,117.616 17.218,117.616 D52.3@17.623,118.021 ; D290.3@15.296,87.59 15.288,87.598 15.288,87.644 15.061,87.871 15.061,88.722 15.44,89.101 15.44,90.083 15.386,90.03 14.775,90.03 14.546,90.258 14.546,91.714 15.353,92.521 D230.3@15.353,92.631 ; D320.3@15.315,85.046 15.288,85.073 15.288,85.144 15.061,85.371 15.061,86.167 15.44,86.546 D290.3@15.44,87.558 ; D350.3@15.44,82.483 15.41,82.483 15.061,82.831 15.061,83.647 15.44,84.026 D320.3@15.44,84.993 ; D170.3@15.45,102.743 15.111,103.081 15.111,103.899 15.486,104.274 15.486,105.268 15.446,105.268 15.092,105.622 15.092,107.5 D110.3@15.453,107.861 15.301,108.012 15.301,108.2 15.074,108.427 15.074,110.022 15.393,110.341 D80.3@15.49,110.341 ; D27.3@17.548,120.661 17.952,120.256 19.656,120.256 19.921,120.521 D28.3@19.932,120.521 ; D52.3@17.665,117.927 17.717,117.927 18.027,117.616 19.718,117.616 D53.3@20.123,118.021 ; D291.3@17.846,87.59 17.838,87.598 17.838,87.644 17.648,87.835 17.648,88.022 17.611,88.059 17.611,88.587 17.99,88.965 17.99,90.106 17.614,90.481 17.614,91.286 17.993,91.665 D231.3@17.993,92.541 ; D201.3@17.863,100.107 17.841,100.129 17.841,100.254 17.614,100.481 17.614,101.299 17.99,101.674 D171.3@17.99,102.643 ; D321.3@17.865,85.046 17.838,85.073 17.838,85.144 17.611,85.371 17.611,86.167 17.99,86.546 D291.3@17.99,87.558 ; D171.3@17.95,102.683 17.611,103.021 17.611,103.847 18.03,104.266 18.03,105.164 17.878,105.316 17.878,105.583 17.651,105.81 17.651,106.59 17.99,106.929 17.99,107.864 17.614,108.239 17.614,109.057 17.99,109.432 D81.3@17.99,110.281 ; D351.3@17.99,82.483 17.95,82.483 17.596,82.836 17.596,83.642 17.99,84.036 D321.3@17.99,84.993 ; D28.3@20.06,120.661 20.212,120.509 20.465,120.256 22.168,120.256 22.457,120.545 D29.3@22.532,120.545 ; D53.3@20.154,117.989 20.527,117.616 22.218,117.616 D54.3@22.623,118.021 ; D292.3@20.389,87.59 20.388,87.591 20.388,87.644 20.164,87.868 20.164,88.056 20.161,88.059 20.161,88.726 20.533,89.097 D262.3@20.533,90.103 20.495,90.065 19.85,90.065 19.621,90.294 19.621,90.847 20.533,91.758 D232.3@20.533,92.544 ; D322.3@20.408,85.046 20.381,85.073 20.381,85.144 20.154,85.371 20.154,86.167 20.533,86.546 D292.3@20.533,87.558 ; D202.3@20.413,100.167 20.381,100.199 20.381,100.294 20.154,100.521 20.154,101.344 20.54,101.729 D172.3@20.54,102.703 ; D172.3@20.5,102.743 20.161,103.081 20.161,103.899 20.536,104.274 20.536,105.268 20.515,105.268 20.161,105.622 20.161,106.476 20.54,106.855 20.54,107.854 20.172,108.221 20.172,108.409 20.154,108.427 20.154,109.145 20.54,109.531 D82.3@20.54,110.341 ; D352.3@20.533,82.483 20.533,82.55 20.161,82.921 20.161,83.696 20.533,84.067 D322.3@20.533,84.993 ; D293.3@22.896,87.55 22.888,87.558 22.888,87.644 22.661,87.871 22.661,89.691 23.04,90.07 23.04,90.136 22.651,90.524 22.651,92.23 22.891,92.469 22.921,92.469 22.953,92.501 D233.3@22.953,92.591 ; D323.3@22.915,85.006 22.888,85.033 22.888,85.104 22.661,85.331 22.661,86.147 23.04,86.526 D293.3@23.04,87.518 ; D203.3@22.938,100.304 22.711,100.531 22.711,101.352 23.09,101.731 D173.3@23.09,102.703 ; D353.3@23.04,82.443 D353.3@23.04,82.503 22.661,82.881 22.661,83.652 23.04,84.031 D323.3@23.04,84.953 ; D173.3@23.05,102.743 22.711,103.081 22.711,103.899 23.086,104.274 23.086,105.246 22.711,105.621 22.711,106.476 23.09,106.855 23.09,107.844 22.694,108.239 22.694,109.047 23.09,109.442 D83.3@23.09,110.341 ; v1(25.171,109.77) 25.224,109.823 25.224,110.012 D84.3@25.613,110.401 ; D294.3@25.469,87.535 25.247,87.758 25.247,88.633 25.69,89.076 D264.3@25.69,90.103 25.311,90.481 25.311,91.325 25.613,91.626 25.613,92.469 25.547,92.535 D234.3@25.547,92.555 ; D204.3@25.486,100.157 25.461,100.182 25.461,100.304 25.234,100.531 25.234,101.347 25.613,101.726 D174.3@25.613,102.693 ; D324.3@25.488,84.991 25.461,85.018 25.461,85.089 25.234,85.316 25.234,86.159 25.613,86.537 D294.3@25.613,87.503 ; v1(25.559,92.734) 25.559,92.674 D234.3@25.613,92.621 ; D174.3@25.573,102.733 25.234,103.071 25.234,103.894 25.609,104.269 25.609,105.273 25.261,105.621 25.261,106.49 25.613,106.841 D114.3@25.613,107.861 25.234,108.239 25.234,109.055 25.613,109.434 D84.3@25.613,110.331 ; D354.3@25.613,82.428 D354.3@25.613,82.503 25.234,82.881 25.234,83.645 25.613,84.023 D324.3@25.613,84.938 ; D55.3@27.663,118.12 28.093,117.69 29.725,117.69 D56.3@30.155,118.12 30.585,117.69 32.238,117.69 D57.3@32.668,118.12 33.097,117.69 34.744,117.69 D58.3@35.173,118.12 35.603,117.69 37.273,117.69 37.348,117.764 37.348,117.787 D59.3@37.68,118.12 ; D405.3@27.7,72.418 28.079,72.038 29.865,72.038 D406.3@30.27,72.443 30.674,72.038 32.415,72.038 D407.3@32.82,72.443 33.224,72.038 34.965,72.038 35.37,72.443 35.774,72.038 37.515,72.038 D409.3@37.92,72.443 ; D380.3@27.703,74.931 28.127,74.507 29.961,74.507 D381.3@30.34,74.885 30.733,74.492 32.421,74.492 D382.3@32.8,74.87 33.209,74.461 34.882,74.461 D383.3@35.26,74.84 35.593,74.507 37.391,74.507 D384.3@37.77,74.886 ; D30.3@27.705,120.661 28.135,120.231 29.767,120.231 30.197,120.661 30.627,120.231 32.28,120.231 32.709,120.661 33.139,120.231 34.786,120.231 35.215,120.661 35.645,120.231 37.315,120.231 37.389,120.306 37.389,120.328 D34.3@37.722,120.661 ; D205.3@27.938,100.182 27.938,100.304 27.711,100.531 27.711,101.347 28.09,101.726 D175.3@28.09,102.693 ; D295.3@27.996,87.55 27.988,87.558 27.988,87.832 27.761,88.059 27.761,88.587 27.876,88.701 28.14,88.965 28.14,90.116 27.774,90.481 27.774,92.242 28.053,92.521 D235.3@28.053,92.591 ; D325.3@28.015,85.006 27.988,85.033 27.988,85.104 27.761,85.331 27.761,86.12 27.771,86.129 27.844,86.129 27.876,86.161 27.915,86.161 28.111,86.358 28.111,86.47 28.14,86.498 D295.3@28.14,87.518 ; D175.3@28.05,102.733 27.711,103.071 27.711,104.814 28.086,105.19 28.086,105.296 27.988,105.394 27.988,105.582 27.761,105.809 27.761,107.469 28.09,107.798 28.09,107.924 27.774,108.239 27.774,110.022 28.083,110.331 D85.3@28.09,110.331 ; D355.3@28.14,82.443 D355.3@28.14,82.503 27.761,82.881 27.761,83.652 28.14,84.031 D325.3@28.14,84.953 ; D326.3@30.488,85.104 30.151,85.441 30.151,86.487 30.64,86.975 D296.3@30.64,87.518 ; D296.3@30.496,87.55 30.488,87.558 30.488,87.644 30.249,87.883 30.249,89.027 30.7,89.478 30.7,90.095 30.314,90.481 30.314,92.242 D236.3@30.541,92.469 ; D206.3@30.563,100.157 30.563,100.219 30.261,100.521 30.261,101.237 30.855,101.83 30.855,102.528 D176.3@30.69,102.693 ; D356.3@30.64,82.503 30.261,82.881 30.261,83.652 30.64,84.031 D326.3@30.64,84.926 ; D176.3@30.65,102.733 30.128,103.255 30.128,104.332 30.381,104.584 30.434,104.584 30.686,104.837 30.686,105.258 30.675,105.258 30.311,105.621 30.311,106.476 30.69,106.855 30.69,107.864 30.314,108.239 30.314,108.955 30.708,109.348 30.708,109.79 30.69,109.808 D86.3@30.69,110.331 ; D297.3@33.046,87.55 33.038,87.558 33.038,87.644 32.811,87.871 32.811,88.701 33.233,89.122 33.233,89.951 33.19,89.994 33.19,90.146 32.854,90.481 32.854,92.242 33.081,92.469 33.081,92.569 D237.3@33.103,92.591 ; D327.3@33.065,85.006 33.038,85.033 33.038,85.104 32.811,85.331 32.811,86.147 33.19,86.526 D297.3@33.19,87.518 ; D207.3@33.113,100.157 33.081,100.189 33.081,100.294 32.854,100.521 32.854,101.339 33.24,101.724 D177.3@33.24,102.693 ; D357.3@33.19,82.443 D357.3@33.19,82.503 32.811,82.881 32.811,83.652 33.19,84.031 D327.3@33.19,84.953 ; D177.3@33.2,102.733 32.861,103.071 32.861,103.894 33.236,104.269 33.236,105.258 33.225,105.258 32.616,105.867 32.616,106.773 33.24,107.397 33.24,107.854 32.872,108.221 32.872,108.409 32.854,108.427 32.854,109.145 33.24,109.531 D87.3@33.24,110.331 ; D298.3@35.596,87.5 35.588,87.508 35.588,87.594 35.361,87.821 35.361,89.691 35.663,89.993 35.74,89.993 35.74,90.136 35.394,90.481 35.394,91.286 35.819,91.711 35.819,91.95 35.823,91.954 35.823,92.469 35.751,92.541 D238.3@35.653,92.541 ; D328.3@35.615,84.956 35.588,84.983 35.588,85.054 35.394,85.249 35.394,85.436 35.361,85.469 35.361,86.097 35.74,86.476 D298.3@35.74,87.468 ; D208.3@35.638,100.192 35.638,100.294 35.411,100.521 35.411,101.347 35.79,101.726 D178.3@35.79,102.703 ; D358.3@35.74,82.393 D358.3@35.74,82.453 35.361,82.831 35.361,83.602 35.74,83.981 D328.3@35.74,84.903 ; D178.3@35.75,102.743 35.411,103.081 35.411,103.899 35.786,104.274 35.786,105.246 35.411,105.621 35.411,106.476 35.79,106.855 35.79,107.844 35.394,108.239 35.394,109.047 35.79,109.442 D88.3@35.79,110.341 ; D209.3@38.113,100.167 38.088,100.192 38.088,100.344 37.861,100.571 37.861,101.372 38.24,101.751 D179.3@38.24,102.703 ; D299.3@38.146,87.5 38.138,87.508 38.138,87.594 37.911,87.821 37.911,88.697 38.29,89.076 38.29,90.126 37.934,90.481 37.934,92.242 D239.3@38.313,92.621 ; D329.3@38.165,84.956 38.138,84.983 38.138,85.054 37.911,85.281 37.911,86.097 38.29,86.476 38.29,86.561 38.304,86.576 38.304,86.899 38.29,86.913 D299.3@38.29,87.468 ; D179.3@38.2,102.743 37.861,103.081 37.861,103.899 38.236,104.274 38.236,105.263 37.877,105.622 37.877,107.425 38.24,107.788 38.24,107.934 37.934,108.239 v1(37.934,109.748) 37.982,109.795 37.982,110.07 38.24,110.328 D89.3@38.24,110.341
  Top Layer w0.4: C77.1@50.863,131.855 C78.1@50.863,133.529 50.981,133.647 50.981,134.955 R43.1@51.099,135.073
  Top Layer w0.5: J1.SH@20.311,154.86 20.311,154.804 20.542,154.573 21.381,154.573 21.431,154.523 J1.B1A12@21.431,154.285 ; B2.2@37.457,155.578 v1(37.741,155.863)
  Int2 (Sign) w0.09: v1(-7.83,72.681) v1@-7.83,72.705 ; v1(24.885,110.49) 24.885,110.076 25.171,109.79 v1(25.171,109.77)
  Int2 (Sign) w0.127: v1(-31.672,112.226) -31.672,111.295 v1(-30.596,110.218)
  Int3 (Sign) w0.09: v1(-23.08,72.539) v1@-23.08,72.548
  Int4 (PWR) w0.127: v1(-23.088,119.771) v1(-23.076,118.021)
  Bottom Layer w0.09: U9.40@-31.395,93.743 -31.395,94.168 -31,94.563 -30.19,94.563 U9.42@-29.795,94.168 ; U9.42@-29.795,93.743 U9.42@-29.795,94.168 ; v1(-29.036,94.223) -29.157,94.344 -29.62,94.344 U9.42@-29.795,94.168 ; U6.40@-17.513,111.468 -17.513,111.043 -17.118,110.648 -16.308,110.648 -15.913,111.043 U6.42@-15.913,111.468 -15.264,111.468 U6.43@-15.113,111.619 ; U10.43@-14.995,93.758 -14.995,94.183 -14.478,94.7 -13.714,94.7 v1(-13.69,94.676) ; v1(-2.327,110.182) -1.913,110.596 U23.42@-1.913,111.483 ; U23.10@1.422,102.548 1.627,102.753 2.328,102.753 v1(2.346,102.771) ; C74.1@3.503,93.451 3.503,93.551 3.98,94.028 v1(3.98,94.155) ; C73.1@3.918,111.231 3.918,111.721 v1(3.929,111.733) ; C75.1@17.155,93.451 v1(17.155,93.467) ; U7.40@24.487,111.483 24.487,111.058 24.826,110.719 24.826,110.549 v1(24.885,110.49) 25.519,110.49 26.087,111.058 U7.42@26.087,111.483 ; U11.10@29.54,84.823 30.348,84.823 30.451,84.926 v1(30.535,84.926) ; U8.42@40.087,111.483 U8.43@40.887,111.483 ; v1(42.255,102.556) 43.414,102.556 U8.10@43.422,102.548
  Bottom Layer w0.127: v1(-31.672,112.226) -31.672,111.627 U5.40@-31.513,111.468 ; U5.42@-29.913,111.468 U5.43@-29.113,111.468 ; C30.1@-24.437,93.451 -23.604,93.451 -23.5,93.555 v1(-23.426,93.555) ; C26.1@-24.437,111.231 -24.166,111.503 v1(-24.166,112.07) ; C31.1@-10.987,93.451 -10.429,93.451 -9.93,93.949 v1(-9.93,94.183) ; v3(11.905,91.496) 12.99,92.581 U25.43@12.99,93.743 ; U26.43@12.887,111.483 v1(12.887,112.461) ; U7.18@22.887,100.013 v1(23.082,100.179) ; U11.40@24.605,93.758 24.605,93.333 25.169,92.769 25.525,92.769 v1(25.559,92.734) ; U7.42@26.087,111.483 U7.43@26.887,111.483 ; U11.42@26.205,93.758 U11.43@27.005,93.758 ; v1(30.693,92.621) 30.745,92.673 30.845,92.673 31.523,93.351 C33.1@31.523,93.451 ; U8.21@34.487,100.013 U8.18@36.887,100.013 ; v1(38.203,92.511) 38.605,92.913 U12.40@38.605,93.758 ; U12.42@40.205,93.758 U12.43@41.005,93.758
  Bottom Layer w0.5: v1(6.405,154.987) ccw(c6.405,156.487) 7.905,156.487 C45.1@7.905,156.658 ; U11.21@20.605,82.288 U11.20@21.405,82.288 v1(22.205,82.288) U11.18@23.005,82.288
  other v1: -41.85,67.3 -39.85,67.3 -37.85,67.3 -35.85,67.3 -33.85,67.3 -31.85,67.3 -29.85,67.3 -27.85,67.3 -25.85,67.3 -23.85,67.3 -21.85,67.3 -19.85,67.3 -17.85,67.3 -15.85,67.3 -13.85,67.3 -11.85,67.3 -9.85,67.3 -7.85,67.3 -5.85,67.3 -3.85,67.3 -1.85,67.3 0.15,67.3 2.15,67.3 4.15,67.3 6.15,67.3 8.15,67.3 10.15,67.3 12.15,67.3 14.15,67.3 16.15,67.3 18.15,67.3 20.15,67.3 22.15,67.3 24.15,67.3 26.15,67.3 28.15,67.3 30.15,67.3 32.15,67.3 40.15,67.3 42.15,67.3 44.15,67.3 46.15,67.3 -44.85,69.3 -42.85,69.3 -40.85,69.3 -38.85,69.3 -36.85,69.3 -34.85,69.3 33.15,69.3 45.15,69.3 47.15,69.3 49.15,69.3 -41.85,71.3 -39.85,71.3 -37.85,71.3 -19.85,71.3 -3.85,71.3 8.15,71.3 26.15,71.3 32.15,71.3 42.15,71.3 44.15,71.3 46.15,71.3 50.15,71.3 -40.85,73.3 -38.85,73.3 43.15,73.3 -45.85,75.3 -43.85,75.3 -41.85,75.3 -39.85,75.3 -37.85,75.3 46.15,75.3 48.15,75.3 50.15,75.3 -44.85,77.3 -42.85,77.3 -40.85,77.3 -38.85,77.3 -36.85,77.3 -34.85,77.3 -30.85,77.3 39.15,77.3 41.15,77.3 43.15,77.3 47.15,77.3 49.15,77.3 -45.85,79.3 -43.85,79.3 -41.85,79.3 -39.85,79.3 -37.85,79.3 42.15,79.3 44.15,79.3 48.15,79.3 50.15,79.3 -44.85,81.3 -42.85,81.3 -40.85,81.3 -38.85,81.3 47.15,81.3 49.15,81.3 -45.85,83.3 -43.85,83.3 -41.85,83.3 -39.85,83.3 48.15,83.3 50.15,83.3 -44.85,85.3 -42.85,85.3 47.15,85.3 49.15,85.3 -45.85,87.3 -43.85,87.3 50.15,87.3 -42.85,89.3 -41.85,91.3 -39.85,91.3 47.15,101.3 47.15,105.3 49.15,105.3 48.15,107.3 47.15,109.3 49.15,109.3 38.15,115.3 40.15,115.3 -34.85,117.3 44.15,119.3 47.15,121.3 18.15,123.3 -39.85,131.3 -39.85,139.3 31.15,141.3 -38.675,142.641 31.653,143.517 -39.85,143.935 -37.919,143.935
RGB30_OUT_8: D209.1 D210.4 | length 167.3
  Top Layer w0.09: v1(-36.772,93.957) -36.719,93.957 -36.717,93.955 -35.236,93.955 -34.877,93.597 -34.877,93.195 -34.765,93.083 -34.629,93.083 -34.517,92.971 D210.4@-34.517,92.621 ; D209.1@38.24,101.023 38.52,100.743 38.52,100.529 38.65,100.399 38.65,99.997 39.676,98.97 v1(40.11,98.97) 41.687,97.393 41.687,83.319 v1(42.63,82.376)
  Int4 (PWR) w0.09: v1(-36.772,93.957) -36.772,91.763 -36.163,91.154 -36.163,80.113 v1(-35.46,79.41)
  Bottom Layer w0.09: v1(-35.46,79.41) -34.932,79.41 -34.543,79.41 cw(c-34.543,79.238) -34.371,79.238 -34.371,78.312 ccw(c-34.199,78.312) -34.199,78.14 ccw(c-34.199,78.312) -34.027,78.312 -34.027,79.773 cw(c-33.855,79.773) -33.855,79.945 cw(c-33.855,79.773) -33.683,79.773 -33.683,78.312 ccw(c-33.511,78.312) -33.511,78.14 ccw(c-33.511,78.312) -33.339,78.312 -33.339,79.471 cw(c-33.167,79.471) -33.167,79.643 cw(c-33.167,79.471) -32.995,79.471 -32.995,78.312 ccw(c-32.823,78.312) -32.823,78.14 ccw(c-32.823,78.312) -32.651,78.312 -32.651,79.442 cw(c-32.479,79.442) -32.479,79.614 cw(c-32.479,79.442) -32.307,79.442 -32.307,78.312 ccw(c-32.135,78.312) -32.135,78.14 ccw(c-32.135,78.312) -31.963,78.312 -31.963,79.442 cw(c-31.791,79.442) -31.791,79.614 cw(c-31.791,79.442) -31.619,79.442 -31.619,78.312 ccw(c-31.447,78.312) -31.447,78.14 ccw(c-31.447,78.312) -31.275,78.312 -31.275,80.508 cw(c-31.103,80.508) -31.103,80.68 cw(c-31.103,80.508) -30.931,80.508 -30.931,78.312 ccw(c-30.759,78.312) -30.759,78.14 ccw(c-30.759,78.312) -30.587,78.312 -30.587,79.238 cw(c-30.415,79.238) -30.415,79.41 -29.997,79.41 18.825,79.41 19.214,79.41 cw(c19.214,79.238) 19.386,79.238 19.386,78.312 ccw(c19.558,78.312) 19.558,78.14 ccw(c19.558,78.312) 19.73,78.312 19.73,79.742 cw(c19.902,79.742) 19.902,79.914 cw(c19.902,79.742) 20.074,79.742 20.074,78.312 ccw(c20.246,78.312) 20.246,78.14 ccw(c20.246,78.312) 20.418,78.312 20.418,79.442 cw(c20.59,79.442) 20.59,79.614 cw(c20.59,79.442) 20.762,79.442 20.762,78.312 ccw(c20.934,78.312) 20.934,78.14 ccw(c20.934,78.312) 21.106,78.312 21.106,79.442 cw(c21.278,79.442) 21.278,79.614 cw(c21.278,79.442) 21.45,79.442 21.45,78.312 ccw(c21.622,78.312) 21.622,78.14 ccw(c21.622,78.312) 21.794,78.312 21.794,79.714 cw(c21.966,79.714) 21.966,79.886 cw(c21.966,79.714) 22.138,79.714 22.138,78.312 ccw(c22.31,78.312) 22.31,78.14 ccw(c22.31,78.312) 22.482,78.312 22.482,79.53 cw(c22.654,79.53) 22.654,79.702 cw(c22.654,79.53) 22.826,79.53 22.826,78.312 ccw(c22.998,78.312) 22.998,78.14 ccw(c22.998,78.312) 23.17,78.312 23.17,79.442 cw(c23.342,79.442) 23.342,79.614 cw(c23.342,79.442) 23.514,79.442 23.514,78.312 ccw(c23.686,78.312) 23.686,78.14 ccw(c23.686,78.312) 23.858,78.312 23.858,79.442 cw(c24.03,79.442) 24.03,79.614 cw(c24.03,79.442) 24.202,79.442 24.202,78.312 ccw(c24.374,78.312) 24.374,78.14 ccw(c24.374,78.312) 24.546,78.312 24.546,80.508 cw(c24.718,80.508) 24.718,80.68 cw(c24.718,80.508) 24.89,80.508 24.89,78.312 ccw(c25.062,78.312) 25.062,78.14 ccw(c25.062,78.312) 25.234,78.312 25.234,79.238 cw(c25.406,79.238) 25.406,79.41 25.819,79.41 40.545,79.41 40.726,79.591 cw(c40.848,79.47) 41.02,79.47 41.02,78.312 ccw(c41.192,78.312) 41.192,78.14 ccw(c41.192,78.312) 41.364,78.312 41.364,80.158 cw(c41.536,80.158) 41.414,80.279 41.805,80.67 42.63,81.495 v1(42.63,82.376)
RGB_CONTROL_1: D10.4 U13.37 | length 81.3
  Top Layer w0.09: U13.37@35.26,136.335 v1(36.902,136.335)
  Int2 (Sign) w0.09: v1(-27.632,124.782) -26.245,124.782 -24.358,122.894 v1(-22.008,122.894) ; v1(21.625,124.807) 21.625,125.836 32.123,136.335 v1(36.902,136.335)
  Int3 (Sign) w0.09: v1(-32.445,123.99) -31.653,124.782 v1(-27.632,124.782) ; v1(-5.722,122.825) 19.643,122.825 v1(21.625,124.807)
  Int4 (PWR) w0.09: v1(-33.27,121.441) -33.27,123.165 v1(-32.445,123.99) ; v1(-22.008,122.894) -8.602,122.894 -8.394,122.686 -5.946,122.686 -5.806,122.825 v1(-5.722,122.825)
RP_1_N: U4.14 U13.46 | length 54.4
  Top Layer w0.116: v1(17.512,152.136) 17.512,151.959 17.37,151.817 17.37,150.838 18.257,149.95 19.538,149.95 20.329,149.95 cw(c20.329,149.523) 20.757,149.523 20.757,149.215 ccw(c20.941,149.215) 21.126,149.215 21.126,150.174 cw(c21.554,150.174) 21.981,150.174 21.981,149.215 ccw(c22.166,149.215) 22.351,149.215 22.351,150.669 cw(c22.779,150.669) 23.206,150.669 23.206,149.352 ccw(c23.391,149.352) 23.576,149.352 23.576,150.669 cw(c24.003,150.669) 24.431,150.669 24.431,149.928 ccw(c24.616,149.928) 24.8,149.928 24.8,150.669 cw(c25.228,150.669) 25.655,150.669 25.655,149.928 ccw(c25.84,149.928) 26.025,149.928 26.025,150.669 cw(c26.453,150.669) 26.88,150.669 26.88,149.928 ccw(c27.065,149.928) 27.25,149.928 27.25,150.669 cw(c27.677,150.669) 28.105,150.669 28.105,149.928 ccw(c28.29,149.928) 28.474,149.928 28.474,150.669 cw(c28.902,150.669) 29.329,150.669 29.329,149.215 ccw(c29.514,149.215) 29.699,149.215 29.699,149.523 cw(c30.127,149.523) 30.127,149.95 30.936,149.95 31.233,149.95 33.178,148.005 33.178,147.826 ccw(c33.363,147.826) 33.363,147.641 34.02,147.641 cw(c34.02,147.214) 34.448,147.214 cw(c34.02,147.214) 34.02,146.786 32.093,146.786 ccw(c32.093,146.601) 31.908,146.601 ccw(c32.093,146.601) 32.093,146.417 34.02,146.417 cw(c34.02,145.989) 34.448,145.989 cw(c34.02,145.989) 34.02,145.561 33.363,145.561 ccw(c33.363,145.377) 33.178,145.377 33.178,144.734 33.178,139.535 33.257,139.456 U13.46@33.257,139.138
  Bottom Layer w0.116: U4.14@17.455,151.152 17.473,151.171 17.473,152.097 v1(17.512,152.136)
RP_1_P: U4.13 U13.47 | length 54.4
  Top Layer w0.116: v1(16.985,152.136) 16.985,151.959 17.127,151.817 17.127,150.737 18.085,149.779 18.156,149.708 19.538,149.708 20.329,149.708 cw(c20.329,149.523) 20.514,149.523 20.514,149.215 ccw(c20.941,149.215) 21.369,149.215 21.369,150.174 cw(c21.554,150.174) 21.739,150.174 21.739,149.215 ccw(c22.166,149.215) 22.594,149.215 22.594,150.669 cw(c22.779,150.669) 22.963,150.669 22.963,149.352 ccw(c23.391,149.352) 23.818,149.352 23.818,150.669 cw(c24.003,150.669) 24.188,150.669 24.188,149.928 ccw(c24.616,149.928) 25.043,149.928 25.043,150.669 cw(c25.228,150.669) 25.413,150.669 25.413,149.928 ccw(c25.84,149.928) 26.268,149.928 26.268,150.669 cw(c26.453,150.669) 26.637,150.669 26.637,149.928 ccw(c27.065,149.928) 27.492,149.928 27.492,150.669 cw(c27.677,150.669) 27.862,150.669 27.862,149.928 ccw(c28.29,149.928) 28.717,149.928 28.717,150.669 cw(c28.902,150.669) 29.087,150.669 29.087,149.215 ccw(c29.514,149.215) 29.942,149.215 29.942,149.523 cw(c30.127,149.523) 30.127,149.708 30.936,149.708 31.132,149.708 32.835,148.005 32.935,147.905 32.935,147.826 ccw(c33.363,147.826) 33.363,147.399 34.02,147.399 cw(c34.02,147.214) 34.205,147.214 cw(c34.02,147.214) 34.02,147.029 32.093,147.029 ccw(c32.093,146.601) 31.665,146.601 ccw(c32.093,146.601) 32.093,146.174 34.02,146.174 cw(c34.02,145.989) 34.205,145.989 cw(c34.02,145.989) 34.02,145.804 33.363,145.804 ccw(c33.363,145.377) 32.935,145.377 32.935,144.734 32.935,139.535 32.857,139.456 U13.47@32.857,139.138
  Bottom Layer w0.116: v1(16.985,152.136) 16.985,151.957 17.055,151.887 U4.13@17.055,151.152
RP_SWCLK_5: U13.24
RP_SWDIO_5: U13.25
SEL1_2: R7.2 SW1.1 U4.5 | length 19.3
  Top Layer w0.127: SW1.1@13.95,158.949 SW1.1@15.106,158.966 ; R7.2@16.684,158.966 v1(16.984,158.968)
  Top Layer w0.4: SW1.1@15.106,158.966 R7.2@16.684,158.966
  Int2 (Sign) w0.09: v1(18.255,147.465) 18.255,150.096 19.843,151.684 20.03,151.871 20.682,151.871 20.727,151.826 21.018,151.826 v1(21.062,151.783)
  Int3 (Sign) w0.09: v1(16.984,158.968) 16.984,156.687 19.91,153.761 19.91,152.923 21.05,151.783 v1(21.062,151.783)
  Bottom Layer w0.09: v1(18.255,147.465) U4.5@18.255,148.663
SEL2_2: R6.2 SW1.2 U4.6 | length 20
  Top Layer w0.127: SW1.2@13.95,161.489 SW1.2@15.106,161.506 ; R6.2@16.684,161.506 v1(16.984,161.508)
  Top Layer w0.4: SW1.2@15.106,161.506 R6.2@16.684,161.506
  Int2 (Sign) w0.09: v1(17.855,147.817) 17.855,150.431 19.363,151.939 19.427,151.939 19.63,152.143 v1(19.697,152.143)
  Int3 (Sign) w0.09: v1(16.984,161.508) 16.612,161.136 16.612,155.04 19.334,152.317 19.438,152.317 19.613,152.143 v1(19.697,152.143)
  Bottom Layer w0.09: v1(17.855,147.817) U4.6@17.855,148.663
SINE_TRANG_WAV_1: J6.4 U25.8 | length 37.1
  Top Layer w0.09: v1(44.249,94.597) 48.133,94.597 48.766,95.23 J6.4@48.905,95.23
  Int3 (Sign) w0.09: v1(39.885,91.197) 43.285,94.597 v1(44.249,94.597)
  Bottom Layer w0.09: U25.8@15.525,86.408 16.658,86.408 17.078,86.828 22.626,86.828 22.69,86.892 28.741,86.892 28.805,86.828 35.516,86.828 v1(39.885,91.197)
SPI_CLK_6: U16.33 U22.6 | length 6.7
  Top Layer w0.127: U16.33@-23.952,135.718 -21.131,135.718 -20.845,135.432 -20.845,134.884 -20.515,134.554 -19.155,134.554 -19.08,134.629 U22.6@-19.08,135.602
SPI_CS0_6: U16.32 U22.1 | length 10.4
  Top Layer w0.127: U16.32@-23.952,135.318 v1(-22.2,135.318) ; v1(-16.54,139.946) U22.1@-16.54,141.052
  Bottom Layer w0.127: v1(-22.2,135.318) -17.571,139.946 v1(-16.54,139.946)
SPI_D_6: U16.35 U22.5 | length 4.5
  Top Layer w0.127: U16.35@-23.952,136.518 -20.425,136.518 -20.35,136.443 U22.5@-20.35,135.602
SPI_HD_6: U16.30 U22.7 | length 7.4
  Top Layer w0.127: U16.30@-23.952,134.518 -20.936,134.518 -20.745,134.327 -18.037,134.327 -17.81,134.554 U22.7@-17.81,135.602
SPI_Q_6: U16.34 U22.2 | length 12.6
  Top Layer w0.127: U16.34@-23.952,136.118 v1(-22.785,136.118) ; v1(-21.591,141.531) -20.471,142.65 -18.375,142.65 -17.81,142.085 U22.2@-17.81,141.052
  Bottom Layer w0.127: v1(-22.785,136.118) -21.591,137.312 v1(-21.591,141.531)
SPI_WP_6: U16.31 U22.3 | length 12
  Top Layer w0.127: U16.31@-23.952,134.918 v1(-22.785,134.918) ; v1(-21.114,141.307) -21.062,141.359 -21.062,141.553 -20.89,141.725 -20.342,142.273 -19.155,142.273 -19.08,142.199 U22.3@-19.08,141.052
  Bottom Layer w0.127: v1(-22.785,134.918) -22.785,135.565 -21.114,137.237 v1(-21.114,141.307)